# EAGLE board Variotiny4_v3 (EAGLE 7.2.0)
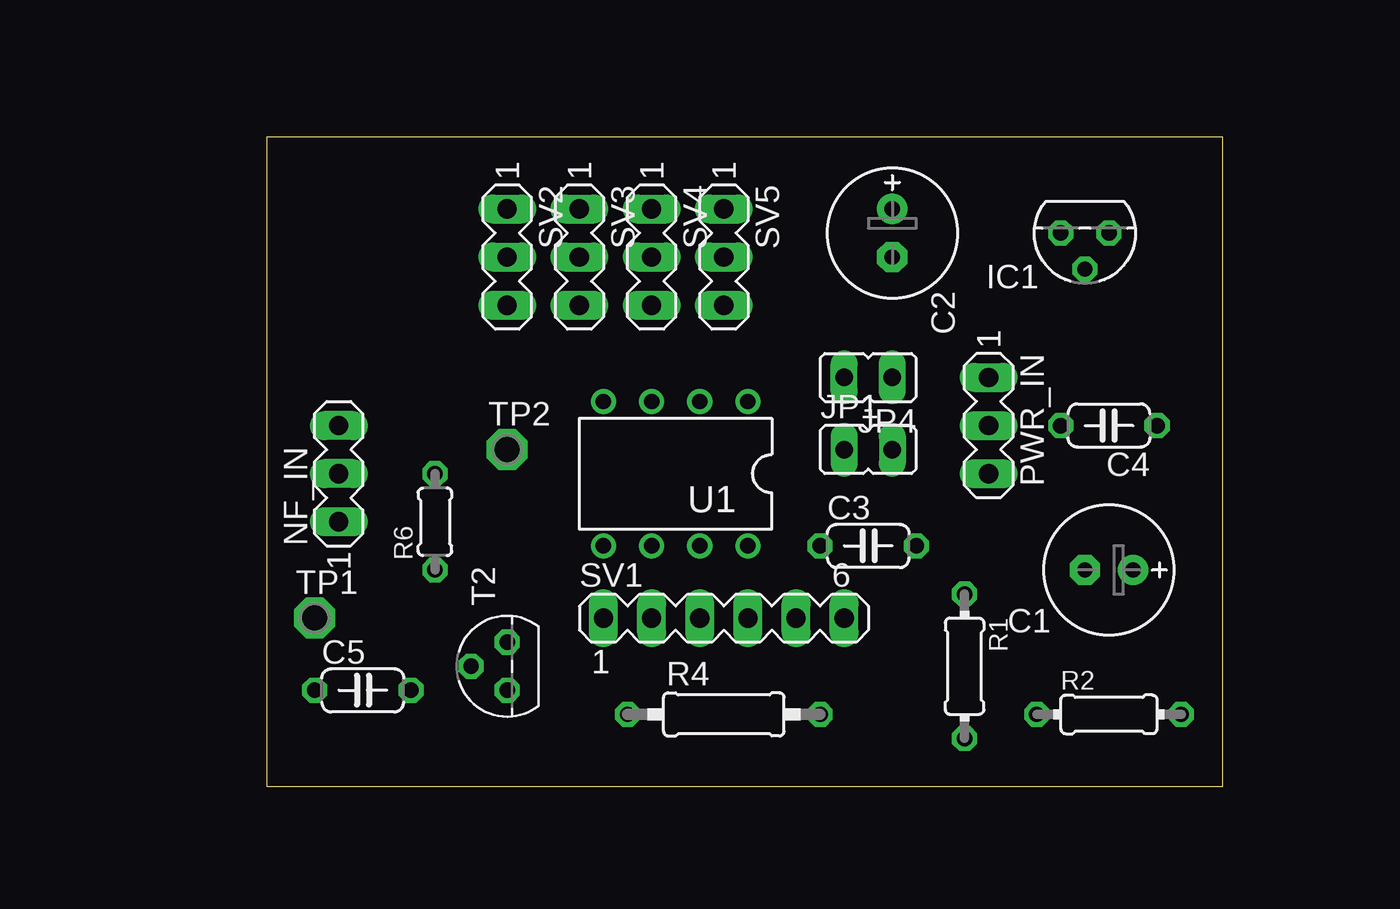
[diagram p0: board, top side]
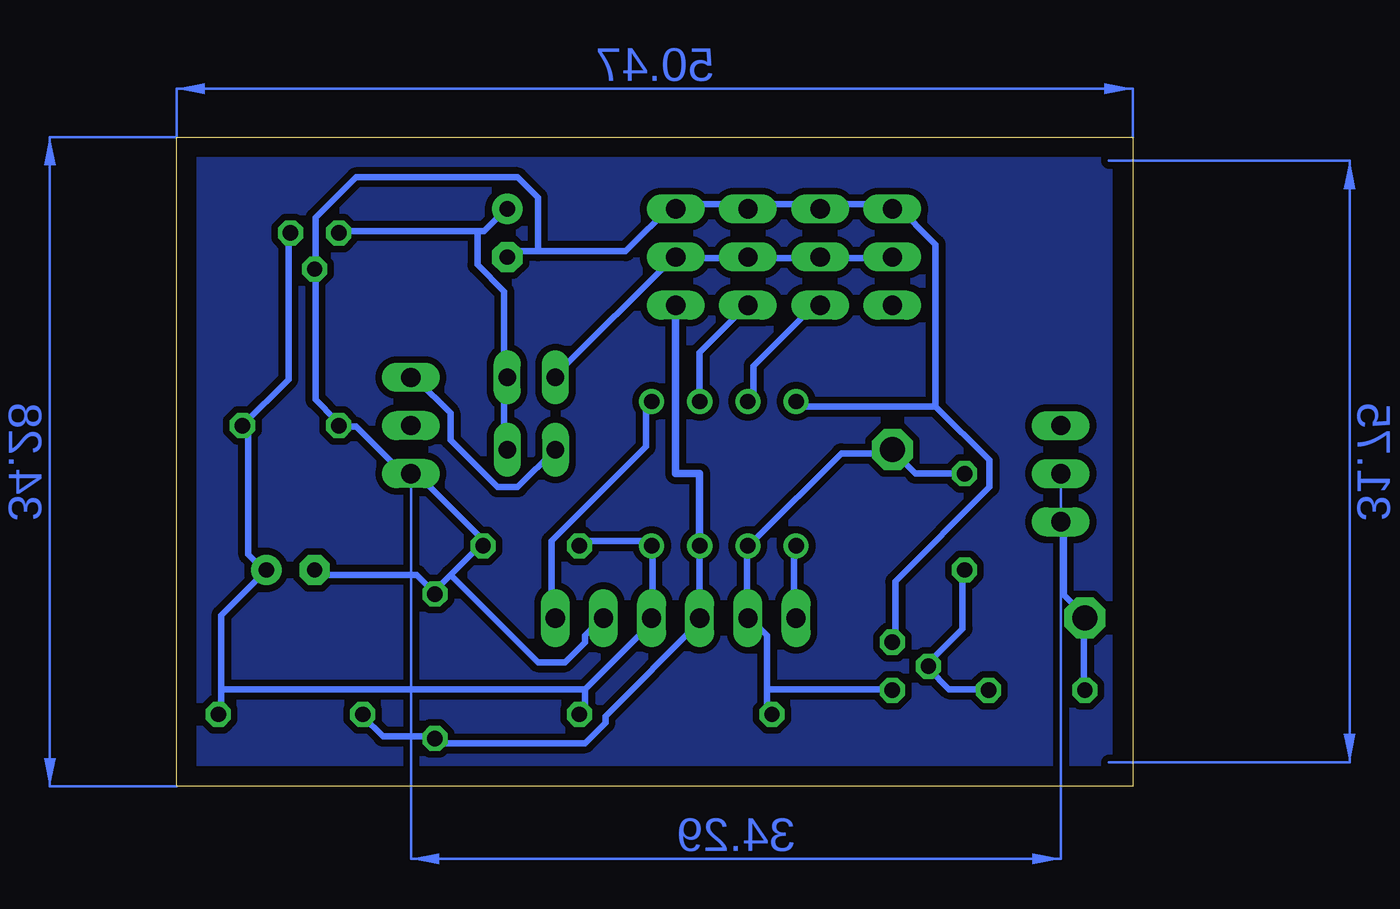
[diagram p1: board, bottom side, seen from below]

Size 50.47 x 34.28 mm. Coordinates in mm from the lower left corner, seen from the top.
Outline: 0,0 50.47,0 50.47,34.28 0,34.28 0,0
Copper layers (1*16): Top 0.035mm / dielectric 1.5mm / Bottom 0.035mm
Design rules "default *": minimum track width 14mil, minimum drill 14mil, track to track 14mil, track to pad 14mil, pad to pad 14mil, via to via 14mil, smd to smd 14mil, copper to edge 40mil, drill to drill 14mil, minimum pad ring 10mil, minimum via ring 8mil, stop-mask expansion 4mil, vias tented up to drill 0mil, thermal gap 10mil

## Footprints (pad centres in the part's own frame; a part is rotated, then mirrored left to right if it is on the bottom)
E2,5-7 = drill 0.813 pad 1.6: + -1.27,0 | drill 0.813 pad 1.6 octagon: - 1.27,0
C050-024X044 = drill 0.813 octagon: 1 -2.54,0; 2 2.54,0
TO92 = drill 0.813 octagon: 1 -1.27,0; 2 0,1.905; 3 1.27,0
JP1 = drill 0.914 long: 1 0,-1.27; 2 0,1.27
MA03-1 = drill 1.016 long: 1 -2.54,0; 2 0,0; 3 2.54,0
0204/7 = drill 0.813 octagon: 1 -3.81,0; 2 3.81,0
0207/10 = drill 0.813 octagon: 1 -5.08,0; 2 5.08,0
0204/5 = drill 0.813 octagon: 1 -2.54,0; 2 2.54,0
MA06-1 = drill 1.016 long: 1 -6.35,0; 2 -3.81,0; 3 -1.27,0; 4 1.27,0; 5 3.81,0; 6 6.35,0
TO92' = drill 0.813 octagon: 1 1.27,0; 2 0,1.905; 3 -1.27,0
P1-13 = drill 1.321 pad 2.159 octagon: TP 0,0
PDIP08_300MIL = drill 0.813: 1 -3.81,-3.81; 2 -1.27,-3.81; 3 1.27,-3.81; 4 3.81,-3.81; 5 3.81,3.81; 6 1.27,3.81; 7 -1.27,3.81; 8 -3.81,3.81

## Placement (x,y rotation side)
C1  470 uF  [E2,5-7]  44.45,11.43 180 top
C2  470 uF  [E2,5-7]  33.02,29.21 270 top
C3  100 nF  [C050-024X044]  31.75,12.7 0 top
C4  100 nF  [C050-024X044]  44.45,19.05 180 top
C5  100 nF  [C050-024X044]  5.08,5.08 0 top
IC1  78L05Z  [TO92]  43.18,29.21 180 top
JP1  Rec. Power  [JP1]  31.75,17.78 270 top
JP4  External Power  [JP1]  31.75,21.59 90 top
NF_IN  NF  [MA03-1]  3.81,16.51 90 top
PWR_IN  PWR  [MA03-1]  38.1,19.05 270 top
R1  20 k  [0204/7]  36.83,6.35 270 top
R2  20 k  [0204/7]  44.45,3.81 0 top
R4  53 k  [0207/10]  24.13,3.81 0 top
R6  1,3 M  [0204/5]  8.89,13.97 90 top
SV1  PRG  [MA06-1]  24.13,8.89 0 top
SV2  BAT  [MA03-1]  12.7,27.94 270 top
SV3  K3  [MA03-1]  16.51,27.94 270 top
SV4  K2  [MA03-1]  20.32,27.94 270 top
SV5  K1  [MA03-1]  24.13,27.94 270 top
T2  BC547  [TO92']  12.7,6.35 90 top
TP1  TPSPAD1-13  [P1-13]  2.54,8.89 0 top
TP2  TPSPAD1-13  [P1-13]  12.7,17.78 0 top
U1  ATTINY45-P  [PDIP08_300MIL]  21.59,16.51 180 top

## Library data of the parts
C1-C5 R1 R2 R4 R6 = resistor
IC1 = linear
JP1 JP4 = jumper
NF_IN PWR_IN SV1-SV5 = con-lstb; OC_FARNELL: unknown; OC_NEWARK: unknown
T2 = transistor
TP1 TP2 = testpad
U1 = _hhn_attiny25_45_85

## Nets
+5V: JP4.2 SV2.2 SV3.2 SV4.2 SV5.2
GND: C1.- C2.- C3.2 C4.2 IC1.2 PWR_IN.3 R1.1 SV1.5 SV2.1 SV3.1 SV4.1 SV5.1 T2.1 U1.4
N$1: C2.+ IC1.3 JP1.2 JP4.1
N$2: JP1.1 PWR_IN.1
N$3: SV1.1 U1.5
N$4: SV4.3 U1.2
N$5: R1.2 R2.1 SV1.3 SV5.3 U1.7
N$6: SV3.3 U1.3
N$7: R4.1 R6.2 SV1.2 T2.3 TP2.TP U1.6
N$8: SV1.6 U1.1
N$12: C5.2 R6.1 T2.2
N$15: C1.+ C3.1 C4.1 IC1.1 R2.2 R4.2 SV1.4 U1.8
N$24: C5.1 NF_IN.1 TP1.TP

## Tracks (layer width: path | path; a pad name or v marks a point on that pad's centre or on a via)
+5V
  Bottom 0.356: SV2.2 12.9,27.89 16.46,27.89 SV3.2 16.82,27.89 20.02,27.89 SV4.2 20.37,27.89 23.93,27.89 SV5.2 24.28,27.89 30.33,21.84 JP4.2
GND
  Bottom 0.356: 36.02,11.18 36.73,10.46 R1.1 37.08,10.46 37.8,11.18 43.13,11.18 C1.- | 36.02,11.18 34.6,12.6 C3.2 34.24,12.95 37.8,16.51 PWR_IN.3 38.51,16.51 41,19 41.71,19 C4.2 42.06,19.36 43.13,20.42 43.13,27.18 IC1.2 43.13,27.53 43.13,30.02 41,32.16 32.46,32.16 31.39,31.09 31.39,28.25 | 36.02,11.18 31.39,6.55 29.97,6.55 28.91,7.62 28.91,7.98 28.19,8.69 SV1.5 | 10.41,20.07 7.57,17.22 7.57,15.8 12.55,10.82 12.55,7.62 T2.1 | 10.41,20.07 17.53,20.07 U1.4 | 31.39,28.25 26.77,28.25 24.28,30.73 SV5.1 23.93,30.73 20.37,30.73 SV4.1 20.02,30.73 16.82,30.73 SV3.1 16.46,30.73 12.9,30.73 SV2.1 12.55,30.73 10.41,28.6 10.41,20.07 | 31.39,28.25 32.82,28.25 C2.-
N$1
  Bottom 0.356: JP1.2 33.17,17.93 33.17,21.49 JP4.1 33.17,21.84 33.17,26.11 34.6,27.53 34.6,29.31 | 34.6,29.31 34.24,29.31 33.17,30.38 C2.+ | 34.6,29.31 41.71,29.31 IC1.3
N$2
  Bottom 0.356: JP1.1 32.46,15.8 33.53,15.8 36.02,18.29 36.02,19.71 37.8,21.49 PWR_IN.1
N$3
  Bottom 0.356: U1.5 17.88,12.6 17.88,9.04 SV1.1
N$4
  Bottom 0.356: U1.2 22.86,22.91 20.37,25.4 SV4.3
N$5
  Bottom 0.356: U1.7 SV1.3 22.86,8.69 27.84,3.71 27.84,3.35 28.91,2.29 36.73,2.29 R1.2 37.08,2.64 39.57,2.64 40.64,3.71 R2.1
  Bottom 0.406: SV5.3 24.13,16.51 22.86,16.51 U1.7
N$6
  Bottom 0.356: U1.3 20.02,20.42 20.02,22.2 16.82,25.4 SV3.3
N$7
  Bottom 0.356: R6.2 11.48,16.51 12.55,17.58 TP2.TP 12.9,17.58 15.39,17.58 20.02,12.95 U1.6 20.37,12.6 20.37,9.04 SV1.2 20.02,8.69 19.3,7.98 19.3,5.13 | 19.3,5.13 19.3,4.06 R4.1 | 19.3,5.13 12.9,5.13 T2.3
N$8
  Bottom 0.356: U1.1 25.71,20.07 25.71,17.93 30.68,12.95 30.68,9.04 SV1.6
N$9
  pour Bottom: 1.27,33.02 49.53,33.02 49.53,31.75 49.53,1.27 1.27,1.27
N$12
  Bottom 0.356: C5.2 7.93,5.13 9.7,5.13 10.77,6.2 T2.2 10.77,6.55 8.99,8.33 8.99,11.18 R6.1
N$15
  Bottom 0.356: C3.1 28.91,12.95 25.71,12.95 U1.8 25.35,12.6 25.35,9.04 SV1.4 25.35,8.69 28.91,5.13 | 28.91,5.13 28.91,4.06 R4.2 | 48.11,5.13 48.11,9.04 C1.+ 45.97,11.53 46.68,12.24 46.68,19 C4.1 44.55,21.49 44.55,28.96 IC1.1 | 48.11,5.13 48.11,4.06 R2.2 | 48.11,5.13 28.91,5.13
N$24
  Bottom 0.356: C5.1 2.59,5.13 2.59,8.69 TP1.TP 2.59,9.04 3.66,10.11 3.66,13.67 NF_IN.1
(copper drawn outside any net)
  shapes: Bottom area x4